# EAGLE board CPCS_backplane_1 (EAGLE 9.4.2)
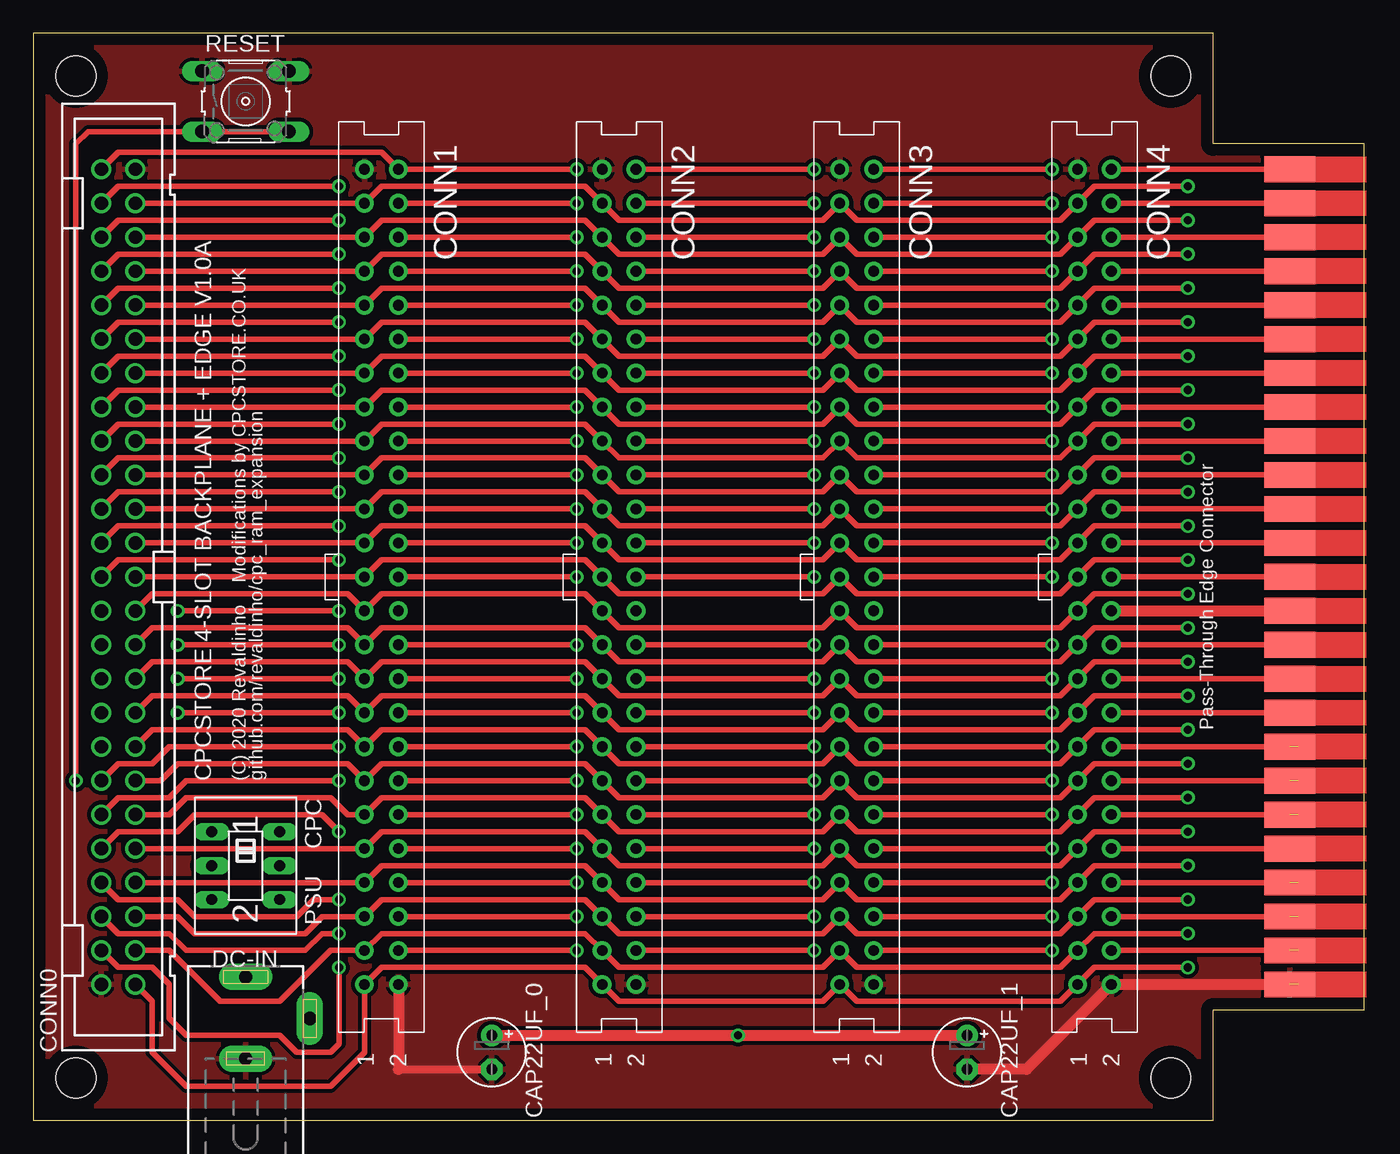
[diagram p0: board, top side]
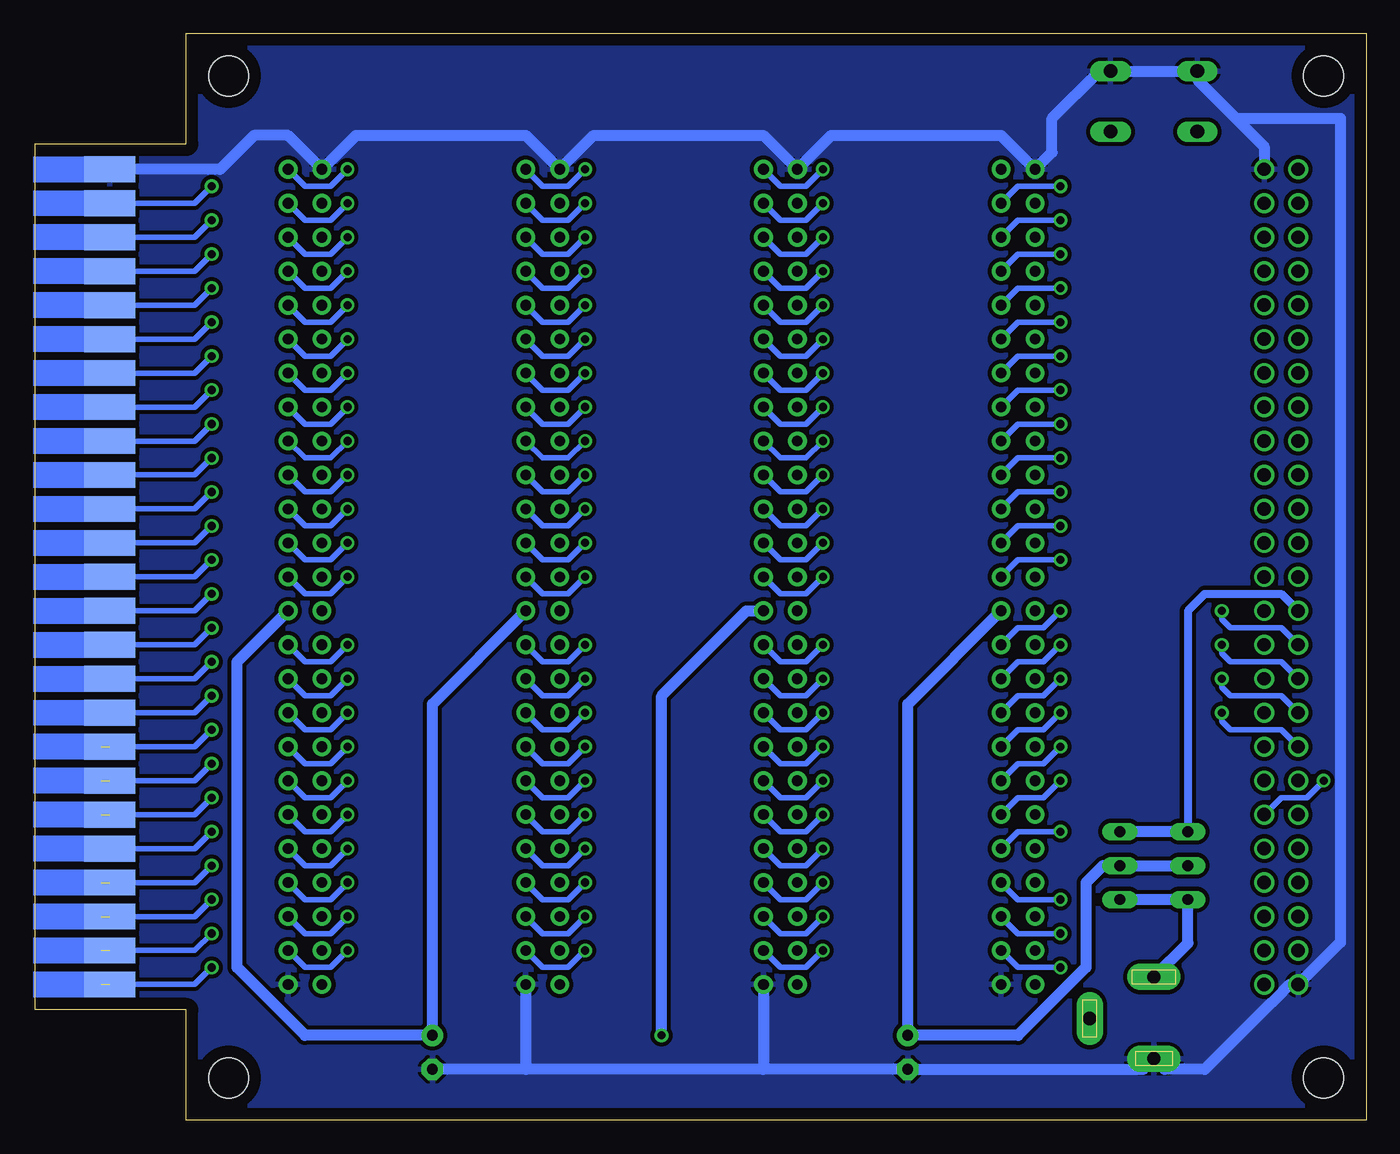
[diagram p1: board, bottom side, seen from below]

Size 99.57 x 81.28 mm. Coordinates in mm from the lower left corner, seen from the top.
Outline: 0,0 88.27,0 88.27,8.26 99.57,8.26 99.57,73.03 88.27,73.03 88.27,81.28 0,81.28 0,0
Copper layers (1*16): Top 0.035mm / dielectric 1.5mm / Bottom 0.035mm
Design rules "default *": minimum track width 10mil, minimum drill 24mil, track to track 8mil, track to pad 8mil, pad to pad 8mil, via to via 8mil, smd to smd 8mil, copper to edge 35mil, drill to drill 8mil, minimum pad ring 10mil, minimum via ring 8mil, stop-mask expansion 4mil, vias tented up to drill 0mil, thermal gap 10mil
Net classes: 0 signal: width 0.406 mm, clearance 0.203 mm; 1 supply: width 0.61 mm, clearance 0.203 mm
Holes 3 mm at 3.17,78.11 85.09,78.11 3.17,3.17 85.09,3.17

## Footprints (pad centres in the part's own frame; a part is rotated, then mirrored left to right if it is on the bottom)
E2,5-5 = drill 0.813 pad 1.6: + -1.27,0 | drill 0.813 pad 1.6 octagon: - 1.27,0
PAK100/2500-50 = drill 1 pad 1.422: 1 -30.48,-1.27; 2 -30.48,1.27; 3 -27.94,-1.27; 4 -27.94,1.27; 5 -25.4,-1.27; 6 -25.4,1.27; 7 -22.86,-1.27; 8 -22.86,1.27; 9 -20.32,-1.27; 10 -20.32,1.27; 11 -17.78,-1.27; 12 -17.78,1.27; 13 -15.24,-1.27; 14 -15.24,1.27; 15 -12.7,-1.27; 16 -12.7,1.27; 17 -10.16,-1.27; 18 -10.16,1.27; 19 -7.62,-1.27; 20 -7.62,1.27; 21 -5.08,-1.27; 22 -5.08,1.27; 23 -2.54,-1.27; 24 -2.54,1.27; 25 0,-1.27; 26 0,1.27; 27 2.54,-1.27; 28 2.54,1.27; 29 5.08,-1.27; 30 5.08,1.27; 31 7.62,-1.27; 32 7.62,1.27; 33 10.16,-1.27; 34 10.16,1.27; 35 12.7,-1.27; 36 12.7,1.27; 37 15.24,-1.27; 38 15.24,1.27; 39 17.78,-1.27; 40 17.78,1.27; 41 20.32,-1.27; 42 20.32,1.27; 43 22.86,-1.27; 44 22.86,1.27; 45 25.4,-1.27; 46 25.4,1.27; 47 27.94,-1.27; 48 27.94,1.27; 49 30.48,-1.27; 50 30.48,1.27
S50V = drill 0.8 pad 1.4: 1 30.48,-1.27; 2 30.48,1.27; 3 27.94,-1.27; 4 27.94,1.27; 5 25.4,-1.27; 6 25.4,1.27; 7 22.86,-1.27; 8 22.86,1.27; 9 20.32,-1.27; 10 20.32,1.27; 11 17.78,-1.27; 12 17.78,1.27; 13 15.24,-1.27; 14 15.24,1.27; 15 12.7,-1.27; 16 12.7,1.27; 17 10.16,-1.27; 18 10.16,1.27; 19 7.62,-1.27; 20 7.62,1.27; 21 5.08,-1.27; 22 5.08,1.27; 23 2.54,-1.27; 24 2.54,1.27; 25 0,-1.27; 26 0,1.27; 27 -2.54,-1.27; 28 -2.54,1.27; 29 -5.08,-1.27; 30 -5.08,1.27; 31 -7.62,-1.27; 32 -7.62,1.27; 33 -10.16,-1.27; 34 -10.16,1.27; 35 -12.7,-1.27; 36 -12.7,1.27; 37 -15.24,-1.27; 38 -15.24,1.27; 39 -17.78,-1.27; 40 -17.78,1.27; 41 -20.32,-1.27; 42 -20.32,1.27; 43 -22.86,-1.27; 44 -22.86,1.27; 45 -25.4,-1.27; 46 -25.4,1.27; 47 -27.94,-1.27; 48 -27.94,1.27; 49 -30.48,-1.27; 50 -30.48,1.27
50WEDGE = smd 3.81 x 1.93: P1 -4.445,13.97; P3 -4.445,11.43; P5 -4.445,8.89; P7 -4.445,6.35; P9 -4.445,3.81; P11 -4.445,1.27; P13 -4.445,-1.27; P15 -4.445,-3.81; P17 -4.445,-6.35; P19 -4.445,-8.89; P21 -4.445,-11.43; P23 -4.445,-13.97; P25 -4.445,-16.51; P27 -4.445,-19.05; P29 -4.445,-21.59; P31 -4.445,-24.13; P33 -4.445,-26.67; P35 -4.445,-29.21; P37 -4.445,-31.75; P39 -4.445,-34.29; P41 -4.445,-36.83; P43 -4.445,-39.37; P45 -4.445,-41.91; P47 -4.445,-44.45; P49 -4.445,-46.99 | smd 3.81 x 1.93 bottom: P2 -4.445,13.97; P4 -4.445,11.43; P6 -4.445,8.89; P8 -4.445,6.35; P10 -4.445,3.81; P12 -4.445,1.27; P14 -4.445,-1.27; P16 -4.445,-3.81; P18 -4.445,-6.35; P20 -4.445,-8.89; P22 -4.445,-11.43; P24 -4.445,-13.97; P26 -4.445,-16.51; P28 -4.445,-19.05; P30 -4.445,-21.59; P32 -4.445,-24.13; P34 -4.445,-26.67; P36 -4.445,-29.21; P38 -4.445,-31.75; P40 -4.445,-34.29; P42 -4.445,-36.83; P44 -4.445,-39.37; P46 -4.445,-41.91; P48 -4.445,-44.45; P50 -4.445,-46.99
DCJ0202 = drill 1 pad 2 long: 1 0,3.1; 2 4.8,0; 3 0,-3
B3F-10XX = drill 1.016 long: 1 -3.251,2.261; 2 3.251,2.261; 3 -3.251,-2.261; 4 3.251,-2.261
A68-A31 = drill 0.813 long: 1 -2.54,-2.54; 2 0,-2.54; 3 2.54,-2.54; 4 -2.54,2.54; 5 0,2.54; 6 2.54,2.54

## Placement (x,y rotation side)
CAP22UF_0  [E2,5-5]  34.29,5.08 270 top
CAP22UF_1  [E2,5-5]  69.85,5.08 270 top
CONN0  [PAK100/2500-50]  6.35,40.64 90 top
CONN1  [S50V]  26.04,40.64 270 top
CONN2  [S50V]  43.82,40.64 270 top
CONN3  [S50V]  61.59,40.64 270 top
CONN4  [S50V]  79.38,40.64 270 top
CONN5  [50WEDGE]  98.42,57.15 0 top
DC-IN  [DCJ0202]  15.88,7.62 0 top
RESET  [B3F-10XX]  15.88,76.2 0 top
SW1  [A68-A31]  15.88,19.05 270 top

## Library data of the parts
CAP22UF_0 CAP22UF_1 = resistor
CONN0 = con-3m
CONN1-CONN4 = con-3m-skt-header
CONN5 = 50WEDGE
DC-IN = con-jack
RESET = switch-omron
SW1 = switch

## Nets
A0: CONN0.33 CONN1.33 CONN2.33 CONN3.33 CONN4.33 CONN5.P18
A1: CONN0.34 CONN1.34 CONN2.34 CONN3.34 CONN4.34 CONN5.P17
A2: CONN0.35 CONN1.35 CONN2.35 CONN3.35 CONN4.35 CONN5.P16
A3: CONN0.36 CONN1.36 CONN2.36 CONN3.36 CONN4.36 CONN5.P15
A4: CONN0.37 CONN1.37 CONN2.37 CONN3.37 CONN4.37 CONN5.P14
A5: CONN0.38 CONN1.38 CONN2.38 CONN3.38 CONN4.38 CONN5.P13
A6: CONN0.39 CONN1.39 CONN2.39 CONN3.39 CONN4.39 CONN5.P12
A7: CONN0.40 CONN1.40 CONN2.40 CONN3.40 CONN4.40 CONN5.P11
A8: CONN0.41 CONN1.41 CONN2.41 CONN3.41 CONN4.41 CONN5.P10
A9: CONN0.42 CONN1.42 CONN2.42 CONN3.42 CONN4.42 CONN5.P9
A10: CONN0.43 CONN1.43 CONN2.43 CONN3.43 CONN4.43 CONN5.P8
A11: CONN0.44 CONN1.44 CONN2.44 CONN3.44 CONN4.44 CONN5.P7
A12: CONN0.45 CONN1.45 CONN2.45 CONN3.45 CONN4.45 CONN5.P6
A13: CONN0.46 CONN1.46 CONN2.46 CONN3.46 CONN4.46 CONN5.P5
A14: CONN0.47 CONN1.47 CONN2.47 CONN3.47 CONN4.47 CONN5.P4
A15: CONN0.48 CONN1.48 CONN2.48 CONN3.48 CONN4.48 CONN5.P3
BUSACK_B: CONN0.13 CONN1.13 CONN2.13 CONN3.13 CONN4.13 CONN5.P38
BUSRESET_B: CONN0.11 CONN1.11 CONN2.11 CONN3.11 CONN4.11 CONN5.P40 RESET.3 RESET.4
BUSRQ_B: CONN0.14 CONN1.14 CONN2.14 CONN3.14 CONN4.14 CONN5.P37
CLK: CONN0.1 CONN1.1 CONN2.1 CONN3.1 CONN4.1 CONN5.P50
CURSOR: CONN0.5 CONN1.5 CONN2.5 CONN3.5 CONN4.5 CONN5.P46
D0: CONN0.25 CONN1.25 CONN2.25 CONN3.25 CONN4.25 CONN5.P26
D1: CONN0.26 CONN1.26 CONN2.26 CONN3.26 CONN4.26 CONN5.P25
D2: CONN0.27 CONN1.27 CONN2.27 CONN3.27 CONN4.27 CONN5.P24
D3: CONN0.28 CONN1.28 CONN2.28 CONN3.28 CONN4.28 CONN5.P23
D4: CONN0.29 CONN1.29 CONN2.29 CONN3.29 CONN4.29 CONN5.P22
D5: CONN0.30 CONN1.30 CONN2.30 CONN3.30 CONN4.30 CONN5.P21
D6: CONN0.31 CONN1.31 CONN2.31 CONN3.31 CONN4.31 CONN5.P20
D7: CONN0.32 CONN1.32 CONN2.32 CONN3.32 CONN4.32 CONN5.P19
EXP_B: CONN0.3 CONN1.3 CONN2.3 CONN3.3 CONN4.3 CONN5.P48
HALT_B: CONN0.17 CONN1.17 CONN2.17 CONN3.17 CONN4.17 CONN5.P34
INT_B: CONN0.16 CONN1.16 CONN2.16 CONN3.16 CONN4.16 CONN5.P35
IOREQ_B: CONN0.20 CONN1.20 CONN2.20 CONN3.20 CONN4.20 CONN5.P31
LPEN: CONN0.4 CONN1.4 CONN2.4 CONN3.4 CONN4.4 CONN5.P47
M1_B: CONN0.22 CONN1.22 CONN2.22 CONN3.22 CONN4.22 CONN5.P29
MREQ_B: CONN0.23 CONN1.23 CONN2.23 CONN3.23 CONN4.23 CONN5.P28
NMI_B: CONN0.15 CONN1.15 CONN2.15 CONN3.15 CONN4.15 CONN5.P36
RAMDIS: CONN0.6 CONN1.6 CONN2.6 CONN3.6 CONN4.6 CONN5.P45
RAMRD_B: CONN0.7 CONN1.7 CONN2.7 CONN3.7 CONN4.7 CONN5.P44
RD_B: CONN0.19 CONN1.19 CONN2.19 CONN3.19 CONN4.19 CONN5.P32
READY: CONN0.12 CONN1.12 CONN2.12 CONN3.12 CONN4.12 CONN5.P39
RESET_B: CONN0.10 CONN1.10 CONN2.10 CONN3.10 CONN4.10 CONN5.P41
RFSH_B: CONN0.21 CONN1.21 CONN2.21 CONN3.21 CONN4.21 CONN5.P30
ROMDIS: CONN0.8 CONN1.8 CONN2.8 CONN3.8 CONN4.8 CONN5.P43
ROMEN_B: CONN0.9 CONN1.9 CONN2.9 CONN3.9 CONN4.9 CONN5.P42
SOUND: CONN0.50 CONN1.50 CONN2.50 CONN3.50 CONN4.50 CONN5.P1
VCC_EXT [supply]: DC-IN.1 SW1.3 SW1.6
VCC_INT [supply]: CONN0.24 SW1.1 SW1.4
VDD1 [supply]: CAP22UF_0.+ CAP22UF_1.+ CONN1.24 CONN2.24 CONN3.24 CONN4.24 CONN5.P27 SW1.2 SW1.5
VSS [supply]: CAP22UF_0.- CAP22UF_1.- CONN0.2 CONN0.49 CONN1.2 CONN1.49 CONN2.2 CONN2.49 CONN3.2 CONN3.49 CONN4.2 CONN4.49 CONN5.P2 CONN5.P49 DC-IN.3 RESET.1 RESET.2
WR_B: CONN0.18 CONN1.18 CONN2.18 CONN3.18 CONN4.18 CONN5.P33

## Tracks (layer width: path | path; a pad name or v marks a point on that pad's centre or on a via)
A0  (via drill 0.61)
  Top 0.406: v86.36,52.07 79.38,52.07 CONN4.33 76.83,49.53 61.59,49.53 CONN3.33 59.05,49.53 43.82,49.53 CONN2.33 41.27,52.07 26.04,52.07 CONN1.33 CONN0.33
  Bottom 0.406: v86.36,52.07 87.63,50.8 CONN5.P18
A1  (via drill 0.61)
  Top 0.406: CONN4.34 CONN5.P17 | CONN3.34 v76.2,50.8 | CONN2.34 v58.42,50.8 | CONN1.34 v40.64,50.8 | CONN0.34 6.35,52.07 v22.86,52.07
  Bottom 0.406: v76.2,50.8 77.47,49.53 79.38,49.53 CONN4.34 | v58.42,50.8 59.69,49.53 61.59,49.53 CONN3.34 | v40.64,50.8 41.91,49.53 43.82,49.53 CONN2.34 | v22.86,52.07 26.04,52.07 CONN1.34
A2  (via drill 0.61)
  Top 0.406: v86.36,54.61 79.38,54.61 CONN4.35 76.83,52.07 61.59,52.07 CONN3.35 59.05,52.07 43.82,52.07 CONN2.35 41.27,54.61 26.04,54.61 CONN1.35 CONN0.35
  Bottom 0.406: v86.36,54.61 87.63,53.34 CONN5.P16
A3  (via drill 0.61)
  Top 0.406: CONN4.36 CONN5.P15 | CONN3.36 v76.2,53.34 | CONN2.36 v58.42,53.34 | CONN1.36 v40.64,53.34 | CONN0.36 6.35,54.61 v22.86,54.61
  Bottom 0.406: v76.2,53.34 77.47,52.07 79.38,52.07 CONN4.36 | v58.42,53.34 59.69,52.07 61.59,52.07 CONN3.36 | v40.64,53.34 41.91,52.07 43.82,52.07 CONN2.36 | v22.86,54.61 26.04,54.61 CONN1.36
A4  (via drill 0.61)
  Top 0.406: v86.36,57.15 79.38,57.15 CONN4.37 76.83,54.61 61.59,54.61 CONN3.37 59.05,54.61 43.82,54.61 CONN2.37 41.27,57.15 26.04,57.15 CONN1.37 CONN0.37
  Bottom 0.406: v86.36,57.15 87.63,55.88 CONN5.P14
A5  (via drill 0.61)
  Top 0.406: CONN4.38 CONN5.P13 | CONN3.38 v76.2,55.88 | CONN2.38 v58.42,55.88 | CONN1.38 v40.64,55.88 | CONN0.38 6.35,57.15 v22.86,57.15
  Bottom 0.406: v76.2,55.88 77.47,54.61 79.38,54.61 CONN4.38 | v58.42,55.88 59.69,54.61 61.59,54.61 CONN3.38 | v40.64,55.88 41.91,54.61 43.82,54.61 CONN2.38 | v22.86,57.15 26.04,57.15 CONN1.38
A6  (via drill 0.61)
  Top 0.406: v86.36,59.69 79.38,59.69 CONN4.39 76.83,57.15 61.59,57.15 CONN3.39 59.05,57.15 43.82,57.15 CONN2.39 41.27,59.69 26.04,59.69 CONN1.39 CONN0.39
  Bottom 0.406: v86.36,59.69 87.63,58.42 CONN5.P12
A7  (via drill 0.61)
  Top 0.406: CONN4.40 CONN5.P11 | CONN3.40 v76.2,58.42 | CONN2.40 v58.42,58.42 | CONN1.40 v40.64,58.42 | CONN0.40 6.35,59.69 v22.86,59.69
  Bottom 0.406: v76.2,58.42 77.47,57.15 79.38,57.15 CONN4.40 | v58.42,58.42 59.69,57.15 61.59,57.15 CONN3.40 | v40.64,58.42 41.91,57.15 43.82,57.15 CONN2.40 | v22.86,59.69 26.04,59.69 CONN1.40
A8  (via drill 0.61)
  Top 0.406: v86.36,62.23 79.38,62.23 CONN4.41 76.83,59.69 61.59,59.69 CONN3.41 59.05,59.69 43.82,59.69 CONN2.41 41.27,62.23 26.04,62.23 CONN1.41 CONN0.41
  Bottom 0.406: v86.36,62.23 87.63,60.96 CONN5.P10
A9  (via drill 0.61)
  Top 0.406: CONN4.42 CONN5.P9 | CONN3.42 v76.2,60.96 | CONN2.42 v58.42,60.96 | CONN1.42 v40.64,60.96 | CONN0.42 6.35,62.23 v22.86,62.23
  Bottom 0.406: v76.2,60.96 77.47,59.69 79.38,59.69 CONN4.42 | v58.42,60.96 59.69,59.69 61.59,59.69 CONN3.42 | v40.64,60.96 41.91,59.69 43.82,59.69 CONN2.42 | v22.86,62.23 26.04,62.23 CONN1.42
A10  (via drill 0.61)
  Top 0.406: v86.36,64.77 79.38,64.77 CONN4.43 76.83,62.23 61.59,62.23 CONN3.43 59.05,62.23 43.82,62.23 CONN2.43 41.27,64.77 26.04,64.77 CONN1.43 CONN0.43
  Bottom 0.406: v86.36,64.77 87.63,63.5 CONN5.P8
A11  (via drill 0.61)
  Top 0.406: CONN4.44 CONN5.P7 | CONN3.44 v76.2,63.5 | CONN2.44 v58.42,63.5 | CONN1.44 v40.64,63.5 | CONN0.44 6.35,64.77 v22.86,64.77
  Bottom 0.406: v76.2,63.5 77.47,62.23 79.38,62.23 CONN4.44 | v58.42,63.5 59.69,62.23 61.59,62.23 CONN3.44 | v40.64,63.5 41.91,62.23 43.82,62.23 CONN2.44 | v22.86,64.77 26.04,64.77 CONN1.44
A12  (via drill 0.61)
  Top 0.406: v86.36,67.31 79.38,67.31 CONN4.45 76.83,64.77 61.59,64.77 CONN3.45 59.05,64.77 43.82,64.77 CONN2.45 41.27,67.31 26.04,67.31 CONN1.45 CONN0.45
  Bottom 0.406: v86.36,67.31 87.63,66.04 CONN5.P6
A13  (via drill 0.61)
  Top 0.406: CONN4.46 CONN5.P5 | CONN3.46 v76.2,66.04 | CONN2.46 v58.42,66.04 | CONN1.46 v40.64,66.04 | CONN0.46 6.35,67.31 v22.86,67.31
  Bottom 0.406: v76.2,66.04 77.47,64.77 79.38,64.77 CONN4.46 | v58.42,66.04 59.69,64.77 61.59,64.77 CONN3.46 | v40.64,66.04 41.91,64.77 43.82,64.77 CONN2.46 | v22.86,67.31 26.04,67.31 CONN1.46
A14  (via drill 0.61)
  Top 0.406: v86.36,69.85 79.38,69.85 CONN4.47 76.83,67.31 61.59,67.31 CONN3.47 59.05,67.31 43.82,67.31 CONN2.47 41.27,69.85 26.04,69.85 CONN1.47 CONN0.47
  Bottom 0.406: v86.36,69.85 87.63,68.58 CONN5.P4
A15  (via drill 0.61)
  Top 0.406: CONN4.48 CONN5.P3 | CONN3.48 v76.2,68.58 | CONN2.48 v58.42,68.58 | CONN1.48 v40.64,68.58 | CONN0.48 6.35,69.85 v22.86,69.85
  Bottom 0.406: v76.2,68.58 77.47,67.31 79.38,67.31 CONN4.48 | v58.42,68.58 59.69,67.31 61.59,67.31 CONN3.48 | v40.64,68.58 41.91,67.31 43.82,67.31 CONN2.48 | v22.86,69.85 26.04,69.85 CONN1.48
BUSACK_B  (via drill 0.61)
  Top 0.406: v86.36,26.67 79.38,26.67 CONN4.13 76.83,24.13 61.59,24.13 CONN3.13 59.05,24.13 43.82,24.13 CONN2.13 41.27,26.67 26.04,26.67 CONN1.13 23.49,26.67 10.79,26.67 9.53,25.4 CONN0.13
  Bottom 0.406: v86.36,26.67 87.63,25.4 CONN5.P38
BUSRESET_B  (via drill 0.61)
  Top 0.406: v86.36,24.13 79.38,24.13 CONN4.11 76.83,21.59 61.59,21.59 CONN3.11 59.05,21.59 43.82,21.59 CONN2.11 41.27,24.13 26.04,24.13 CONN1.11 23.49,22.86 22.22,24.13 11.43,24.13 10.16,22.86 CONN0.11 | RESET.4 RESET.3 4.09,73.94 3.17,73.03 v3.17,25.4
  Bottom 0.406: v86.36,24.13 87.63,22.86 CONN5.P40 | CONN0.11 6.35,24.13 4.45,24.13 v3.17,25.4
BUSRQ_B  (via drill 0.61)  (1 unrouted)
  Top 0.406: CONN4.14 94.61,25.4 | CONN3.14 v76.2,25.4 | CONN2.14 v58.42,25.4 | CONN1.14 v40.64,25.4 | CONN0.14 6.35,26.67 8.89,26.67 10.16,27.94 v22.86,27.94
  Bottom 0.406: v76.2,25.4 77.47,24.13 79.38,24.13 CONN4.14 | v58.42,25.4 59.69,24.13 61.59,24.13 CONN3.14 | v40.64,25.4 41.91,24.13 43.82,24.13 CONN2.14 | v22.86,27.94 24.13,26.67 26.04,26.67 CONN1.14
CLK  (via drill 0.61)  (1 unrouted)
  Top 0.406: v86.36,11.43 79.38,11.43 CONN4.1 76.83,8.89 61.59,8.89 CONN3.1 59.05,8.89 43.82,8.89 CONN2.1 41.27,11.43 26.04,11.43 CONN1.1 24.76,5.08 22.22,2.54 11.43,2.54 8.89,5.08 8.89,8.89 CONN0.1
  Bottom 0.406: v86.36,11.43 87.63,10.16 94.61,10.16
CURSOR  (via drill 0.61)  (1 unrouted)
  Top 0.406: v86.36,16.51 79.38,16.51 CONN4.5 76.83,13.97 61.59,13.97 CONN3.5 59.05,13.97 43.82,13.97 CONN2.5 41.27,16.51 26.04,16.51 CONN1.5 21.59,15.24 20.32,13.97 12.06,13.97 10.79,15.24 CONN0.5
  Bottom 0.406: v86.36,16.51 87.63,15.24 94.61,15.24
D0  (via drill 0.61)
  Top 0.406: v86.36,41.91 79.38,41.91 CONN4.25 76.83,39.37 61.59,39.37 CONN3.25 59.05,39.37 43.82,39.37 CONN2.25 41.27,41.91 26.04,41.91 CONN1.25 CONN0.25
  Bottom 0.406: v86.36,41.91 87.63,40.64 CONN5.P26
D1  (via drill 0.61)
  Top 0.406: CONN4.26 CONN5.P25 | CONN3.26 v76.2,40.64 | CONN2.26 v58.42,40.64 | CONN1.26 v40.64,40.64 | CONN0.26 6.35,41.91 v22.86,41.91
  Bottom 0.406: v76.2,40.64 77.47,39.37 79.38,39.37 CONN4.26 | v58.42,40.64 59.69,39.37 61.59,39.37 CONN3.26 | v40.64,40.64 41.91,39.37 43.82,39.37 CONN2.26 | v22.86,41.91 26.04,41.91 CONN1.26
D2  (via drill 0.61)
  Top 0.406: v86.36,44.45 79.38,44.45 CONN4.27 76.83,41.91 61.59,41.91 CONN3.27 59.05,41.91 43.82,41.91 CONN2.27 41.27,44.45 26.04,44.45 CONN1.27 CONN0.27
  Bottom 0.406: v86.36,44.45 87.63,43.18 CONN5.P24
D3  (via drill 0.61)
  Top 0.406: CONN4.28 CONN5.P23 | CONN3.28 v76.2,43.18 | CONN2.28 v58.42,43.18 | CONN1.28 v40.64,43.18 | CONN0.28 6.35,44.45 v22.86,44.45
  Bottom 0.406: v76.2,43.18 77.47,41.91 79.38,41.91 CONN4.28 | v58.42,43.18 59.69,41.91 61.59,41.91 CONN3.28 | v40.64,43.18 41.91,41.91 43.82,41.91 CONN2.28 | v22.86,44.45 26.04,44.45 CONN1.28
D4  (via drill 0.61)
  Top 0.406: v86.36,46.99 79.38,46.99 CONN4.29 76.83,44.45 61.59,44.45 CONN3.29 59.05,44.45 43.82,44.45 CONN2.29 41.27,46.99 26.04,46.99 CONN1.29 CONN0.29
  Bottom 0.406: v86.36,46.99 87.63,45.72 CONN5.P22
D5  (via drill 0.61)
  Top 0.406: CONN4.30 CONN5.P21 | CONN3.30 v76.2,45.72 | CONN2.30 v58.42,45.72 | CONN1.30 v40.64,45.72 | CONN0.30 6.35,46.99 v22.86,46.99
  Bottom 0.406: v76.2,45.72 77.47,44.45 79.38,44.45 CONN4.30 | v58.42,45.72 59.69,44.45 61.59,44.45 CONN3.30 | v40.64,45.72 41.91,44.45 43.82,44.45 CONN2.30 | v22.86,46.99 26.04,46.99 CONN1.30
D6  (via drill 0.61)
  Top 0.406: v86.36,49.53 79.38,49.53 CONN4.31 76.83,46.99 61.59,46.99 CONN3.31 59.05,46.99 43.82,46.99 CONN2.31 41.27,49.53 26.04,49.53 CONN1.31 CONN0.31
  Bottom 0.406: v86.36,49.53 87.63,48.26 CONN5.P20
D7  (via drill 0.61)
  Top 0.406: CONN4.32 CONN5.P19 | CONN3.32 v76.2,48.26 | CONN2.32 v58.42,48.26 | CONN1.32 v40.64,48.26 | CONN0.32 6.35,49.53 v22.86,49.53
  Bottom 0.406: v76.2,48.26 77.47,46.99 79.38,46.99 CONN4.32 | v58.42,48.26 59.69,46.99 61.59,46.99 CONN3.32 | v40.64,48.26 41.91,46.99 43.82,46.99 CONN2.32 | v22.86,49.53 26.04,49.53 CONN1.32
EXP_B  (via drill 0.61)  (1 unrouted)
  Top 0.406: v86.36,13.97 79.38,13.97 CONN4.3 76.83,11.43 61.59,11.43 CONN3.3 59.05,11.43 43.82,11.43 CONN2.3 41.27,13.97 26.04,13.97 CONN1.3 22.22,12.7 18.41,8.89 13.97,8.89 10.16,12.7 CONN0.3
  Bottom 0.406: v86.36,13.97 87.63,12.7 94.61,12.7
HALT_B  (via drill 0.61)
  Top 0.406: v86.36,31.75 79.38,31.75 CONN4.17 76.83,29.21 61.59,29.21 CONN3.17 59.05,29.21 43.82,29.21 CONN2.17 41.27,31.75 26.04,31.75 CONN1.17 23.49,31.75 8.89,31.75 CONN0.17
  Bottom 0.406: v86.36,31.75 87.63,30.48 CONN5.P34
INT_B  (via drill 0.61)  (1 unrouted)
  Top 0.406: CONN4.16 94.61,27.94 | CONN3.16 v76.2,27.94 | CONN2.16 v58.42,27.94 | CONN1.16 v40.64,27.94 | v10.79,30.48 v22.86,30.48
  Bottom 0.406: v76.2,27.94 77.47,26.67 79.38,26.67 CONN4.16 | v58.42,27.94 59.69,26.67 61.59,26.67 CONN3.16 | v40.64,27.94 41.91,26.67 43.82,26.67 CONN2.16 | CONN0.16 6.35,29.21 10.16,29.21 10.79,29.84 v10.79,30.48 | v22.86,30.48 24.13,29.21 26.04,29.21 CONN1.16
IOREQ_B  (via drill 0.61)
  Top 0.406: CONN4.20 CONN5.P31 | CONN3.20 v76.2,33.02 | CONN2.20 v58.42,33.02 | CONN1.20 v40.64,33.02 | v10.79,35.56 v22.86,35.56
  Bottom 0.406: v76.2,33.02 77.47,31.75 79.38,31.75 CONN4.20 | v58.42,33.02 59.69,31.75 61.59,31.75 CONN3.20 | v40.64,33.02 41.91,31.75 43.82,31.75 CONN2.20 | CONN0.20 6.35,34.29 10.16,34.29 10.79,34.92 v10.79,35.56 | v22.86,35.56 24.13,34.29 26.04,34.29 CONN1.20
LPEN  (via drill 0.61)
  Top 0.406: CONN4.4 CONN5.P47 | CONN3.4 v76.2,12.7 | CONN2.4 v58.42,12.7 | CONN1.4 v40.64,12.7 | CONN0.4 6.35,11.43 8.89,11.43 10.16,10.16 10.16,7.62 11.43,6.35 18.41,6.35 19.68,5.08 22.22,5.08 22.86,5.71 v22.86,11.43
  Bottom 0.406: v76.2,12.7 77.47,11.43 79.38,11.43 CONN4.4 | v58.42,12.7 59.69,11.43 61.59,11.43 CONN3.4 | v40.64,12.7 41.91,11.43 43.82,11.43 CONN2.4 | v22.86,11.43 26.04,11.43 CONN1.4
M1_B  (via drill 0.61)
  Top 0.406: CONN4.22 CONN5.P29 | CONN3.22 v76.2,35.56 | CONN2.22 v58.42,35.56 | CONN1.22 v40.64,35.56 | v10.79,38.1 v22.86,38.1
  Bottom 0.406: v76.2,35.56 77.47,34.29 79.38,34.29 CONN4.22 | v58.42,35.56 59.69,34.29 61.59,34.29 CONN3.22 | v40.64,35.56 41.91,34.29 43.82,34.29 CONN2.22 | CONN0.22 6.35,36.83 10.16,36.83 10.79,37.47 v10.79,38.1 | v22.86,38.1 24.13,36.83 26.04,36.83 CONN1.22
MREQ_B  (via drill 0.61)
  Top 0.406: v86.36,39.37 79.38,39.37 CONN4.23 76.83,36.83 61.59,36.83 CONN3.23 59.05,36.83 43.82,36.83 CONN2.23 41.27,39.37 26.04,39.37 CONN1.23 23.49,39.37 8.89,39.37 CONN0.23
  Bottom 0.406: v86.36,39.37 87.63,38.1 CONN5.P28
NMI_B  (via drill 0.61)
  Top 0.406: v86.36,29.21 79.38,29.21 CONN4.15 76.83,26.67 61.59,26.67 CONN3.15 59.05,26.67 43.82,26.67 CONN2.15 41.27,29.21 26.04,29.21 CONN1.15 23.49,29.21 8.89,29.21 CONN0.15
  Bottom 0.406: v86.36,29.21 87.63,27.94 CONN5.P36
RAMDIS  (via drill 0.61)
  Top 0.406: CONN4.6 CONN5.P45 | CONN3.6 v76.2,15.24 | CONN2.6 v58.42,15.24 | CONN1.6 v40.64,15.24 | CONN0.6 6.35,13.97 10.16,13.97 11.43,12.7 20.32,12.7 21.59,13.97 v22.86,13.97
  Bottom 0.406: v76.2,15.24 77.47,13.97 79.38,13.97 CONN4.6 | v58.42,15.24 59.69,13.97 61.59,13.97 CONN3.6 | v40.64,15.24 41.91,13.97 43.82,13.97 CONN2.6 | v22.86,13.97 26.04,13.97 CONN1.6
RAMRD_B  (via drill 0.61)
  Top 0.406: v86.36,19.05 79.38,19.05 CONN4.7 76.83,16.51 61.59,16.51 CONN3.7 59.05,16.51 43.82,16.51 CONN2.7 41.27,19.05 26.04,19.05 CONN1.7 CONN0.7
  Bottom 0.406: v86.36,19.05 87.63,17.78 CONN5.P44
RD_B  (via drill 0.61)
  Top 0.406: v86.36,34.29 79.38,34.29 CONN4.19 76.83,31.75 61.59,31.75 CONN3.19 59.05,31.75 43.82,31.75 CONN2.19 41.27,34.29 26.04,34.29 CONN1.19 23.49,34.29 8.89,34.29 CONN0.19
  Bottom 0.406: v86.36,34.29 87.63,33.02 CONN5.P32
READY  (via drill 0.61)  (1 unrouted)
  Top 0.406: CONN4.12 94.61,22.86 | CONN3.12 v76.2,22.86 | CONN2.12 v58.42,22.86 | CONN1.12 v40.64,22.86 | CONN0.12 6.35,24.13 10.16,24.13 11.43,25.4 v22.86,25.4
  Bottom 0.406: v76.2,22.86 77.47,21.59 79.38,21.59 CONN4.12 | v58.42,22.86 59.69,21.59 61.59,21.59 CONN3.12 | v40.64,22.86 41.91,21.59 43.82,21.59 CONN2.12 | v22.86,25.4 24.13,24.13 26.04,24.13 CONN1.12
RESET_B  (via drill 0.61)
  Top 0.406: CONN4.10 CONN5.P41 | CONN3.10 v76.2,20.32 | CONN2.10 v58.42,20.32 | CONN1.10 v40.64,20.32 | CONN0.10 6.35,21.59 10.79,21.59 12.06,22.86 21.59,22.86 v22.86,21.59
  Bottom 0.406: v76.2,20.32 77.47,19.05 79.38,19.05 CONN4.10 | v58.42,20.32 59.69,19.05 61.59,19.05 CONN3.10 | v40.64,20.32 41.91,19.05 43.82,19.05 CONN2.10 | v22.86,21.59 26.04,21.59 CONN1.10
RFSH_B  (via drill 0.61)
  Top 0.406: v86.36,36.83 79.38,36.83 CONN4.21 76.83,34.29 61.59,34.29 CONN3.21 59.05,34.29 43.82,34.29 CONN2.21 41.27,36.83 26.04,36.83 CONN1.21 23.49,36.83 8.89,36.83 CONN0.21
  Bottom 0.406: v86.36,36.83 87.63,35.56 CONN5.P30
ROMDIS  (via drill 0.61)  (1 unrouted)
  Top 0.406: CONN4.8 94.61,17.78 | CONN3.8 v76.2,17.78 | CONN2.8 v58.42,17.78 | CONN1.8 v40.64,17.78 | CONN0.8 6.35,16.51 10.79,16.51 12.06,15.24 19.68,15.24 20.95,16.51 v22.86,16.51
  Bottom 0.406: v76.2,17.78 77.47,16.51 79.38,16.51 CONN4.8 | v58.42,17.78 59.69,16.51 61.59,16.51 CONN3.8 | v40.64,17.78 41.91,16.51 43.82,16.51 CONN2.8 | v22.86,16.51 26.04,16.51 CONN1.8
ROMEN_B  (via drill 0.61)
  Top 0.406: v86.36,21.59 79.38,21.59 CONN4.9 76.83,19.05 61.59,19.05 CONN3.9 59.05,19.05 43.82,19.05 CONN2.9 41.27,21.59 26.04,21.59 CONN1.9 CONN0.9
  Bottom 0.406: v86.36,21.59 87.63,20.32 CONN5.P42
SOUND  (via drill 0.61)
  Top 0.406: CONN4.50 CONN5.P1 | CONN3.50 v76.2,71.12 | CONN2.50 v58.42,71.12 | v40.64,71.12 CONN1.50 26.04,72.39 6.35,72.39 CONN0.50
  Bottom 0.406: v76.2,71.12 77.47,69.85 79.38,69.85 CONN4.50 | v58.42,71.12 59.69,69.85 61.59,69.85 CONN3.50 | v40.64,71.12 41.91,69.85 43.82,69.85 CONN2.50
VCC_EXT
  Bottom 0.813: DC-IN.1 13.34,13.26 SW1.3 SW1.6
VCC_INT
  Bottom 0.61: CONN0.24 6.35,39.37 12.06,39.37 13.34,38.1 SW1.1
  Bottom 0.813: SW1.1 SW1.4
VDD1  (via drill 0.61)
  Top 0.813: CONN4.24 CONN5.P27 | CAP22UF_0.+ v52.71,6.35 CAP22UF_1.+
  Bottom 0.813: CONN1.24 34.29,31.11 CAP22UF_0.+ 26.04,6.35 20.95,11.43 20.95,17.78 19.68,19.05 SW1.5 SW1.2 | v52.71,6.35 52.71,31.75 46.36,38.1 CONN2.24 | CONN3.24 69.85,31.11 CAP22UF_1.+ 79.38,6.35 84.45,11.43 84.45,34.29 CONN4.24
VSS  (1 unrouted)
  Top 0.61: 27.3,3.81 CAP22UF_0.-
  Top 0.813: 94.61,10.16 CONN4.2 74.3,3.81 CAP22UF_1.- | CONN1.2 27.3,3.81
  Bottom 0.813: CONN5.P2 85.72,71.12 83.18,73.66 80.64,73.66 CONN4.49 75.56,73.66 62.87,73.66 CONN3.49 57.79,73.66 45.09,73.66 CONN2.49 40.01,73.66 27.3,73.66 CONN1.49 23.49,72.39 23.49,74.93 19.96,78.46 RESET.2 RESET.1 12.62,77.83 9.73,74.93 | 9.73,74.93 7.62,72.82 CONN0.49 | 45.09,3.81 CAP22UF_0.- 16.68,3.81 DC-IN.3 15.06,3.81 12.06,3.81 7.08,8.8 7.06,8.8 6.26,9.6 6.26,9.62 5.71,10.16 CONN0.2 1.93,13.31 1.93,74.93 9.73,74.93 | 45.09,3.81 62.87,3.81 | 62.87,3.81 CAP22UF_1.- | CONN2.2 45.09,3.81 | CONN3.2 62.87,3.81
  pour Bottom (isolate 0.305): 0,81.28 88.27,81.28 88.27,73.66 88.9,73.03 99.06,73.03 99.06,8.26 88.27,8.26 88.27,0 0,0
  pour Top (isolate 0.305): 0,81.28 88.9,81.28 88.9,73.03 99.06,73.03 99.06,8.26 88.27,8.26 88.27,0 0,0
WR_B  (via drill 0.61)
  Top 0.406: CONN4.18 CONN5.P33 | CONN3.18 v76.2,30.48 | CONN2.18 v58.42,30.48 | CONN1.18 v40.64,30.48 | v10.79,33.02 v22.86,33.02
  Bottom 0.406: v76.2,30.48 77.47,29.21 79.38,29.21 CONN4.18 | v58.42,30.48 59.69,29.21 61.59,29.21 CONN3.18 | v40.64,30.48 41.91,29.21 43.82,29.21 CONN2.18 | CONN0.18 6.35,31.75 10.16,31.75 10.79,32.38 v10.79,33.02 | v22.86,33.02 24.13,31.75 26.04,31.75 CONN1.18

## Text on the board
tPlace: Pass-Through Edge Connector | CPCSTORE 4-SLOT BACKPLANE + EDGE V1.0A | (C) 2020 Revaldinho Modifications by CPCSTORE.CO.UK | github.com/revaldinho/cpc_ram_expansion
tNames: CPC | PSU